# Altium PCB TPS buckboost.PcbDoc
Units mm, origin at the board's own origin, x right, y up, seen from the top; angles counter-clockwise.
Board outline 24.13 x 30.48 mm, 2 copper layers (Top Layer, Bottom Layer); 20 components, 12 nets, 63 pads, 85 vias.
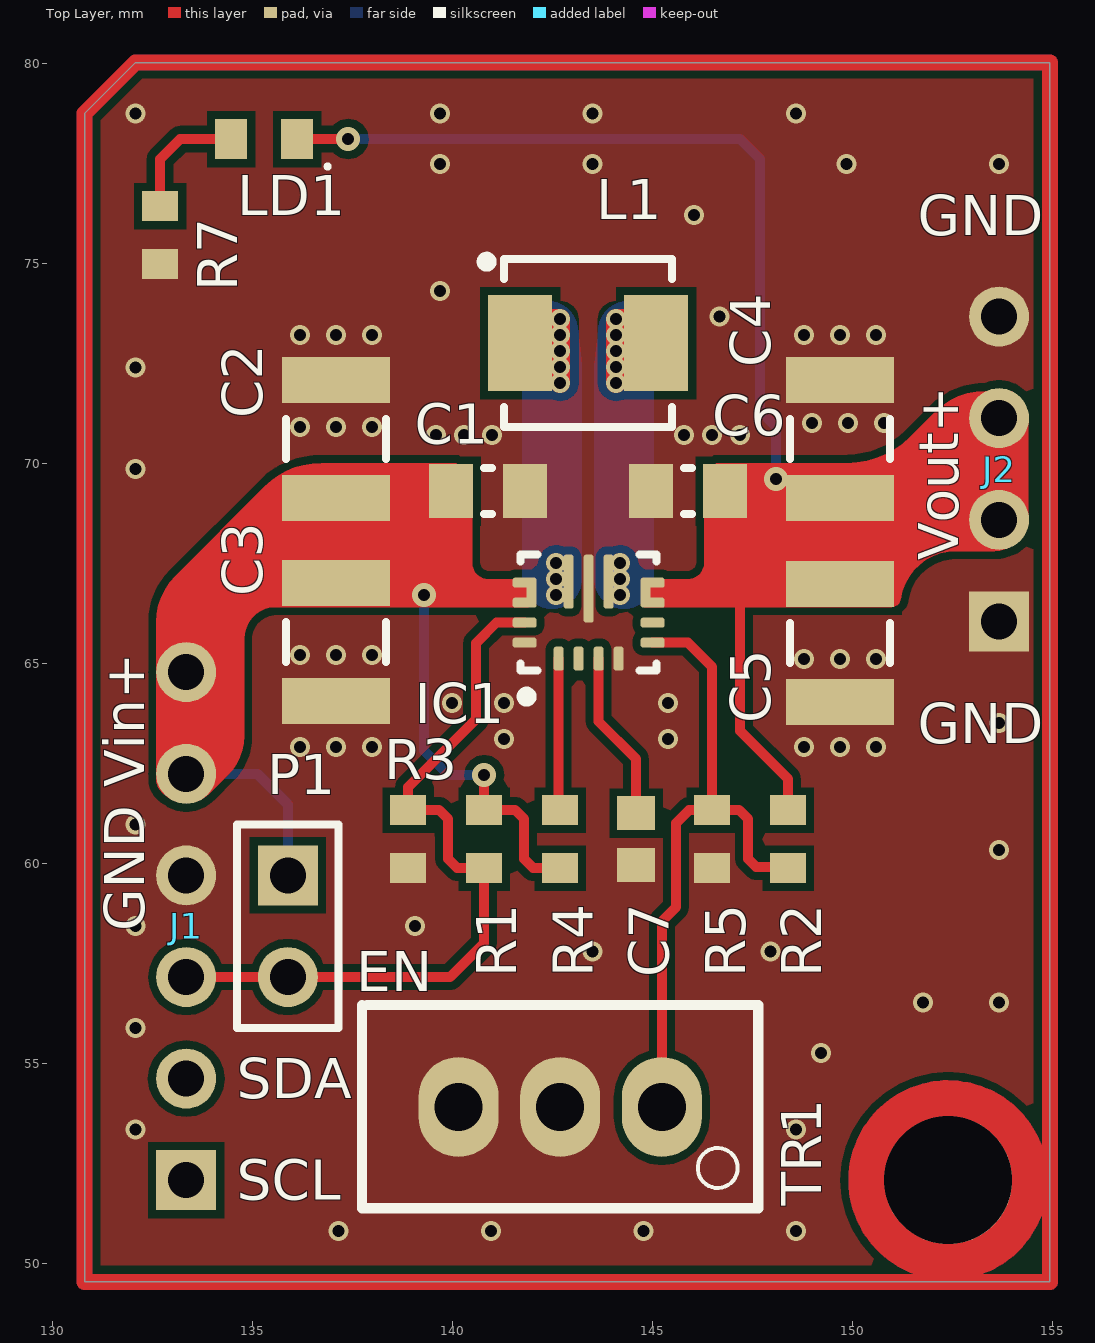
[diagram p0: Top Layer view]
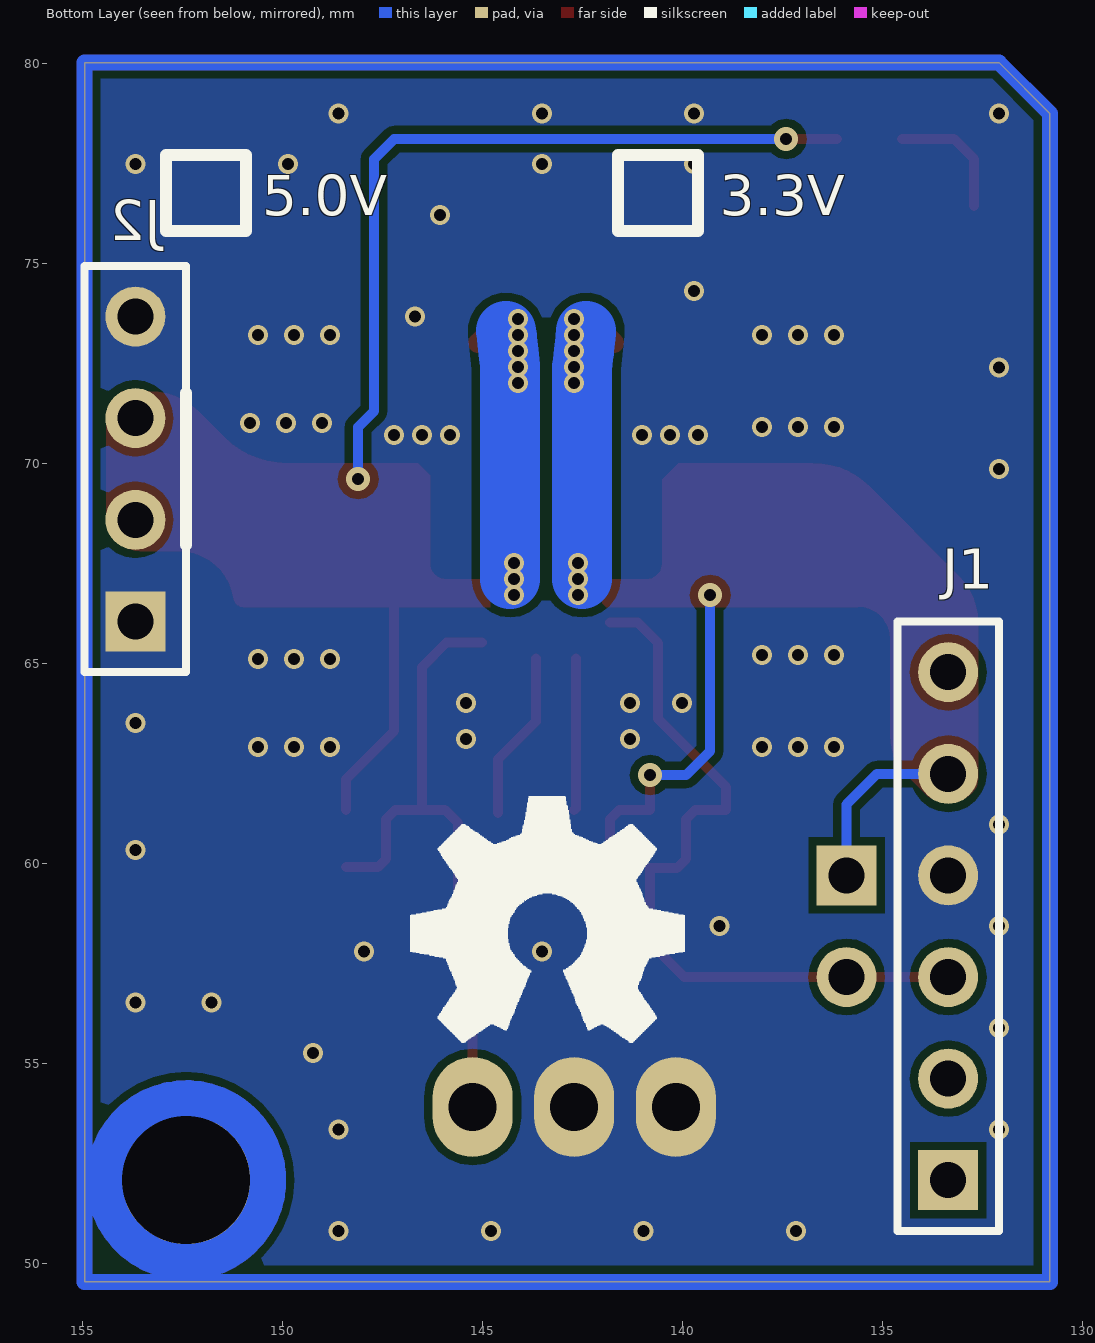
[diagram p1: Bottom Layer view, seen from below]
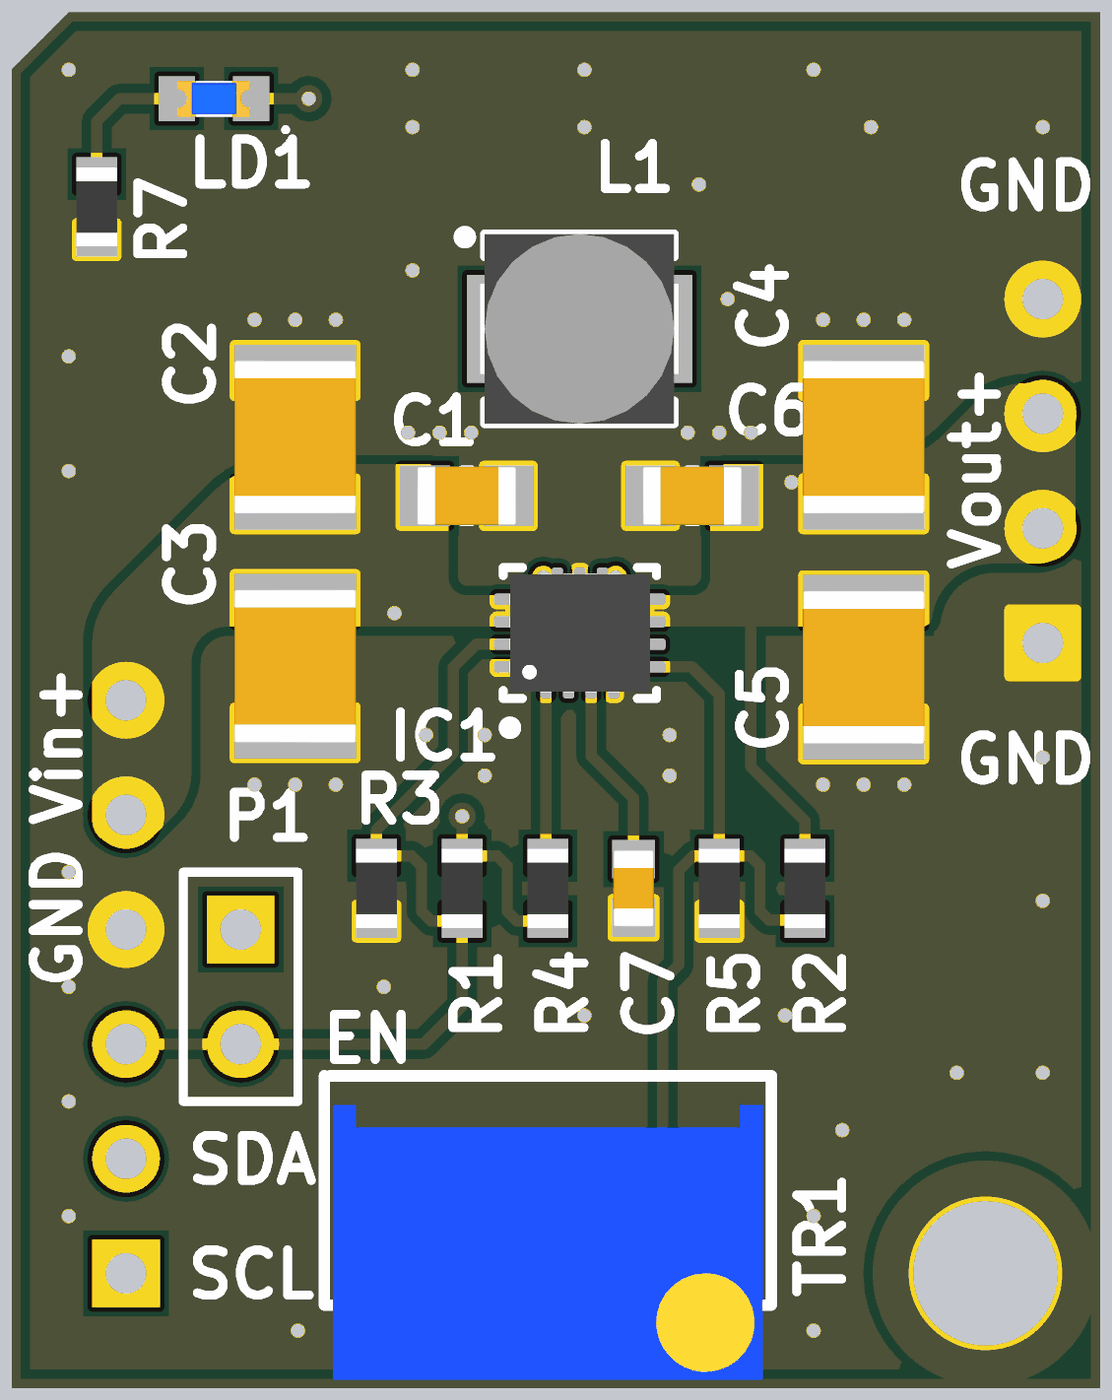
[diagram p2: 3D render of the assembled board from above, using the file's embedded part models]

## Layer stack, top to bottom
Top Solder: solder mask 0.0102, Solder Resist, Dk 3.5
Top Layer: signal copper 0.0356
Dielectric 1: dielectric 0.32, FR-4, Dk 4.8
Bottom Layer: signal copper 0.0356
Bottom Solder: solder mask 0.0102, Solder Resist, Dk 3.5

## Board outline
130.81,49.53 154.94,49.53 154.94,80.01 132.08,80.01 130.81,78.74

## Design rules (kind name [scope] priority, off if disabled: settings)
Clearance Clearance_polygon [InNamedPolygon('GND')] p1: gap=0.2 ignorepadtopadclearanceinfootprint=FALSE
Clearance [All] p2: gap=0.2 ignorepadtopadclearanceinfootprint=FALSE
PolygonConnect [All] p1: connectstyle=Direct reliefconductorwidth=0.254 reliefentries=4 polygonreliefangle="90 Angle" airgapwidth=0.254
RoutingVias [All] p1: holewidth=0.3 width=0.6 viastyle="Through Hole" minholewidth=0.3 minwidth=0.5 maxholewidth=1.8 maxwidth=2
SolderMaskExpansion [All] p1: expansion=0.102
Width [All] p1: maxlimit=5 minlimit=0.2 preferedwidth=0.5
30 further rules are at their usual default settings.

## Components (designator, comment, footprint, x,y, rotation, side; value= is the part's Value field where it differs from the comment)
C1 "Capacitor NP" "0805 CAP" 140.9,69.3 r0 top
C2 "Capacitor NP" "1210 CAP" 137.1,70.6 r270 top
C3 "Capacitor NP" "1210 CAP" 137.1,65.525 r90 top
C4 "Capacitor NP" "1210 CAP" 149.7,70.6 r270 top
C5 "Capacitor NP" "1210 CAP" 149.7,65.5 r90 top
C6 "Capacitor NP" "0805 CAP" 145.9,69.3 r180 top
C7 "Capacitor NP" "0603 cap" 144.6,60.6 r90 top
IC1 "TPS63070/71" "VQFN TPS" 143.41,66.26 r90 top
J1 "Uin" HDR1X6 133.35,52.07 r90 top
J2 "Uout" HDR1X4 153.67,66.04 r90 top
L1 "Inductor" FDSD0420-H 143.4,73 r0 top
LD1 "LED diode" LED_0603 135.3,78.1 r180 top
P1 "EN" HDR1X2 135.89,59.69 r270 top
R1 "Resistor generic" "0603 RES" 140.8,60.6 r90 top
R2 "Resistor generic" "0603 RES" 148.4,60.6 r90 top
R3 "Resistor generic" "0603 RES" 138.9,60.6 r90 top
R4 "Resistor generic" "0603 RES" 142.7,60.6 r90 top
R5 "Resistor generic" "0603 RES" 146.5,60.6 r90 top
R7 "Resistor generic" "0603 RES" 132.7,75.7 r90 top
TR1 "Resistor_trim" "Multiturn 1" 142.7,53.9 r180 top

## Footprints (in the part's own frame and the unit in brackets; to place one, negate y for a bottom-side part, rotate by r counter-clockwise, add the part's x,y. Pads: shape width x height; smd on the part's side, far side on the other; paste and mask are expansions set on the pad)
"0603 cap" [mm]
  rect 0.85x0.95 smd: 1(-0.65,0) 2(0.65,0)
  body extent -0.85,-0.45 0.85,0.45, height 0.8
"0603 RES" [mm] "RES0603 medium"
  rect 0.75x0.9 smd: 1(-0.725,0) 2(0.725,0)
  body extent -0.87,-0.45 0.87,0.45, height 0.4
"0805 CAP" [mm] "0805 cap"
  rect 1.1x1.35 smd: 1(-0.925,0) 2(0.925,0)
  silkscreen extent -0.1,-0.58 0.1,0.58, body extent -1.1,-0.65 1.1,0.65, height 0.8
"1210 CAP" [mm] "1210cap high"
  rect 1.15x2.7 smd: 1(-1.475,0) 2(1.475,0)
  silkscreen extent -0.5,-1.25 0.5,1.25, body extent -1.7,-1.35 1.7,1.35, height 2
FDSD0420-H [mm] "Murata FDSD0420-H SMD Inductor"
  rect 1.6x2.4 smd: 1(-1.7,0) 2(1.7,0)
  silkscreen extent -2.66,-2.1 2.1,2.16, body extent -2.2,-2.1 2.2,2.1, height 2.1
HDR1X2 [mm] "Connector; Header; 2 Position"
  rect 1.5x1.5 hole 0.9: 1(0,0)
  round 1.5 hole 0.9: 2(2.54,0)
  silkscreen extent -1.27,-1.27 3.81,1.27
HDR1X4 [mm] "Connector; Header; 4 Position"
  rect 1.5x1.5 hole 0.9: 1(0,0)
  round 1.5 hole 0.9: 2(2.54,0) 3(5.08,0) 4(7.62,0)
HDR1X6 [mm] "Connector; Header; 6 Position"
  rect 1.5x1.5 hole 0.9: 1(0,0)
  round 1.5 hole 0.9: 2(2.54,0) 3(5.08,0) 4(7.62,0) 5(10.16,0) 6(12.7,0)
LED_0603 [mm] "LED diode 0603"
  rect 0.8x1 smd: 1(-0.825,0) 2(0.825,0)
  silkscreen extent -1.64,0.64 -1.54,0.74, body extent -0.8,-0.4 0.8,0.4, height 0.6
"Multiturn 1" [mm] "Multiturn Trimmer Narrow"
  oval 2x2.5 hole 1.2: 1(-2.54,0) 2(2.54,0) 3(0,0)
  silkscreen extent -4.95,-2.55 4.95,2.53, body extent -4.76,-1.9 4.76,4.19, height 11.56
"VQFN TPS" [mm] "TPS63070"
  rrect50% 0.6x0.25 smd: 1(-1.15,0.75) 2(-1.15,0.25) 3(-1.15,-0.25) 4(-1.15,-0.75)
  rrect50% 0.25x0.6 smd: 5(-0.75,-1.6) 6(-0.25,-1.6) 7(0.25,-1.6) 8(0.75,-1.6) 12(0.75,1.6) 13(0.25,1.6) 14(-0.25,1.6) 15(-0.75,1.6)
  rrect50% 1.35x0.25 smd: 9(0.775,-0.5) 11(0.775,0.5)
  rrect50% 1.7x0.25 smd: 10(0.6,0)
  rrect50% 0.7x0.25 smd: ""(0.5,1.425) ""(0.5,-1.425)
  silkscreen extent -2.22,-1.7 1.45,1.7, body extent -1.31,-1.56 1.31,1.56, height 1

## Part data
C2 C3 C4 C5: Voltage=10V, Valve=22uF
IC1: "Buck-boost switcher", Frequency="2,4 MHz", Supplier Part Number 1=595-TPS630701RNMT, Iout max="2 A", Supplier 1=Mouser, Valve=TPS63070/71, Vin="2-16 VDC", Vout (TPS63070)="2,5-9 VDC", Vout (TPS63071)="5 VDC"
J1: library part "Header 6", "Header, 6-Pin", LatestRevisionDate=17-Jul-2002, LatestRevisionNote="Re-released for DXP Platform.", Publisher="Altium Limited"
J2: library part "Header 4", "Header, 4-Pin", LatestRevisionDate=17-Jul-2002, LatestRevisionNote="Re-released for DXP Platform.", Publisher="Altium Limited"
L1: "Single coil", Supplier Part Number 1=2530091, Supplier 1=Farnell
LD1: "LED"
P1: library part "Header 2", "Header, 2-Pin"
R1 R2 R3 R4 R5 R7: library part Resistor, "Resistor SMD"
  R1: Valve=NP
  R2 R3: Valve=470k
  R4: Valve=10k
  R5: Valve=150k
  R7: Valve=470R
TR1: "Trimmer", Valve=150k
C1 C6: Valve=10uF
C7: Valve=100nF

## Free pads (board coordinates)
  round 3.2 hole 3.2: 2(152.4,52.07)

## Via types
v1: diameter 0.5, hole 0.3, Top Layer to Bottom Layer, tented both sides, 65 vias
v2: diameter 0.5, hole 0.3, Top Layer to Bottom Layer, 16 vias
v3: diameter 0.6, hole 0.3, Top Layer to Bottom Layer, tented both sides, 4 vias

## Nets (pads, with @x,y where several pads share a name; then routed paths per layer and width w, separated by ;. In a path a pad name is that pad's centre, name@x,y a point inside that pad or via, vN(x,y) a via of type N, cw(c..) or ccw(c..) an arc to the next point about the centre after c; other vN are vias at no path point)
GND: C1.2 C2.1 C3.1 C4.1 C5.1 C6.2 C7.1 IC1.4 IC1.10 IC1.15 J1.4 J2.1 J2.4 R3.1 R5.1 R7.1 TR1.2 TR1.3
  other v1: 137.16,50.8 140.97,50.8 144.78,50.8 148.59,50.8 132.08,53.34 148.59,53.34 149.225,55.245 132.08,55.88 151.765,56.515 153.67,56.515 143.51,57.785 147.955,57.785 132.08,58.42 139.065,58.42 153.67,60.325 132.08,60.96 136.2,62.9 137.1,62.9 138,62.9 148.8,62.9 149.7,62.9 150.6,62.9 141.3,63.1 145.4,63.1 153.67,63.5 140,64 141.3,64 145.4,64 148.8,65.1 149.7,65.1 150.6,65.1 136.2,65.2 137.1,65.2 138,65.2 132.08,69.85 139.6,70.7 140.3,70.7 141,70.7 145.8,70.7 146.5,70.7 147.2,70.7 136.2,70.9 137.1,70.9 138,70.9 149,71 149.9,71 150.8,71 132.08,72.39 136.2,73.2 137.1,73.2 138,73.2 148.8,73.2 149.7,73.2 150.6,73.2 146.685,73.66 139.7,74.295 146.05,76.2 139.7,77.47 143.51,77.47 149.86,77.47 153.67,77.47 132.08,78.74 139.7,78.74 143.51,78.74 148.59,78.74
NetC7_2: C7.2 IC1.3 | length 4.2
  Top Layer w0.25: IC1.3 143.66,63.54 144.6,62.6 C7.2
NetIC1_1: IC1.1 R4.2 | length 3.8
  Top Layer w0.25: IC1.1 142.66,61.365 R4.2
NetIC1_5: IC1.5 R2.1 R5.2 TR1.1 | length 16.7
  Top Layer w0.25: IC1.5 145.89,65.51 146.5,64.9 R5.2 ; TR1.1 145.24,58.54 145.6,58.9 145.6,61 145.925,61.325 R5.2 ; R2.1@148.4,59.9 147.6,59.9 147.4,60.1 147.4,61.1 147.175,61.325 R5.2
NetIC1_9: IC1.9 L1.2 | length 9.1
  Top Layer w0.5: v2(144.1,72) v2(144.1,72.4) v2(144.1,72.8) v2(144.1,73.2) v2(144.1,73.6) 144.5,73.6 L1.2
  Bottom Layer w1.5: v2@144.3,67.1 144.3,72.4 144.341,72.773 144.385,73.168 144.4,73.3
  other v2: 144.2,66.7 144.2,67.1 144.2,67.5
NetIC1_11: IC1.11 L1.1 | length 9.1
  Top Layer w0.5: L1.1 142.3,73.6 v2(142.7,73.6) v2(142.7,73.2) v2(142.7,72.8) v2(142.7,72.4) v2(142.7,72)
  Bottom Layer w1.5: 142.4,73.3 142.415,73.168 142.459,72.773 142.5,72.4 v2@142.5,67.1
  other v2: 142.6,66.7 142.6,67.1 142.6,67.5
NetIC1_14: IC1.14 J1.3 P1.2 R1.1 R3.2 | length 19.1
  Top Layer w0.25: J1.3 P1.2 139.95,57.15 140.8,58 R1.1 140.125,59.875 139.9,60.1 139.9,61.1 139.675,61.325 R3.2 138.9,61.9 140.6,63.6 140.6,65.5 141.11,66.01 IC1.14
NetJ1_1: J1.1
NetJ1_2: J1.2
NetLD1_2: LD1.2 R7.2 | length 3.2
  Top Layer w0.25: R7.2 132.7,77.6 133.2,78.1 LD1.2 LD1.2@134.5,78.1
Vin: C1.1 C2.2 C3.2 IC1.12 IC1.13 IC1.@141.985,66.76 J1.5 J1.6 P1.1 R1.2 R4.1 | length 14.4
  Top Layer w0.25: v3(139.3,66.7) v3@139.4,66.8 ; v3(140.8,62.2) R1.2 141.575,61.325 141.8,61.1 141.8,60.1 142.025,59.875 R4.1
  Bottom Layer w0.25: J1.5 135.128,62.23 135.89,61.468 P1.1 ; v3(139.3,66.7) 139.3,62.8 139.9,62.2 v3(140.8,62.2)
Vout: C4.2 C5.2 C6.1 IC1.7 IC1.8 IC1.@144.835,66.76 J2.2 J2.3 LD1.1 R2.2 | length 25.9
  Top Layer w0.25: LD1.1 v3(137.4,78.1) ; 147,66.7 147.2,66.5 147.2,63.3 148.4,62.1 R2.2
  Bottom Layer w0.25: v3(137.4,78.1) 147.2,78.1 147.7,77.6 147.7,71.3 148.1,70.9 v3(148.1,69.6)
pads on no net: IC1.2 IC1.6

## Polygon pours and split planes (outlines as drawn)
GND on Bottom Layer "GND" (solid, remove dead copper, pour order 4): 130.81,49.53 154.94,49.53 154.94,80.01 132.08,80.01 130.81,78.74
GND on Top Layer "GND" (solid, remove dead copper, pour order 3): 130.81,49.53 154.94,49.53 154.94,80.01 132.08,80.01 130.81,78.74

## Other copper
Top Layer:
  region net Vout: 144.8,66.4 150.985,66.4 ccw(c150.985,66.632) 151.214,66.599 cw(c152.6,66.4) 152.6,67.8 153.559,67.8 ccw(c153.559,68.624) 154.141,68.041 ccw(c153.517,68.666) 154.4,68.666 154.4,71.059 ccw(c153.576,71.059) 154.159,71.641 154,71.8 153.324,71.8 ccw(c153.324,70.052) 152.088,71.288 151.454,70.654 cw(c149.876,72.231) 149.876,70 146.6,70 146.3,69.7 146.3,67.5 cw(c145.9,67.5) 145.9,67.1 144.8,67.1 144.8,67
  region net Vin: 133.941,61.741 134.388,62.188 ccw(c133.393,63.183) 134.8,63.183 134.8,65.6 cw(c135.6,65.6) 135.6,66.4 141.9,66.4 142,66.5 142,67.1 140.9,67.1 cw(c140.9,67.5) 140.5,67.5 140.5,69.6 140.1,70 136.724,70 ccw(c136.724,68.01) 135.317,69.417 133.083,67.183 ccw(c134.248,66.017) 132.6,66.017 132.6,62.107 ccw(c133.1,62.107) 132.746,61.754 ccw(c133.359,62.366) 133.359,61.5 ccw(c133.359,62.324)
Multi-Layer:
  circle w1: c152.4,52.07 r2
  lines w0.4: 130.81,49.53 130.81,78.74 132.08,80.01 154.94,80.01 154.94,49.53 130.81,49.53

## Silkscreen, mask and mechanical layers (free items; w line width, h text height)
Top Overlay:
  text "GND" at 151.638,75.692 h1
  text "Vout+" at 152.654,67.564 h1 r90
  text "GND" at 151.638,62.992 h1
  text "Vin+" at 132.3,61.9 h1 r90
  text "GND" at 132.3,58.3 h1 r90
  text "EN" at 137.6,56.8 h1
  text "SDA" at 134.611,54.119 h1
  text "SCL" at 134.611,51.579 h1
Bottom Overlay:
  drawing of 10 lines, arcs and shapes, not listed
  text "3.3V" at 139.065,76.2 h1
  text "5.0V" at 150.495,76.2 h1